# EAGLE board Zaxxon-Adaptor (EAGLE 9.6.2)
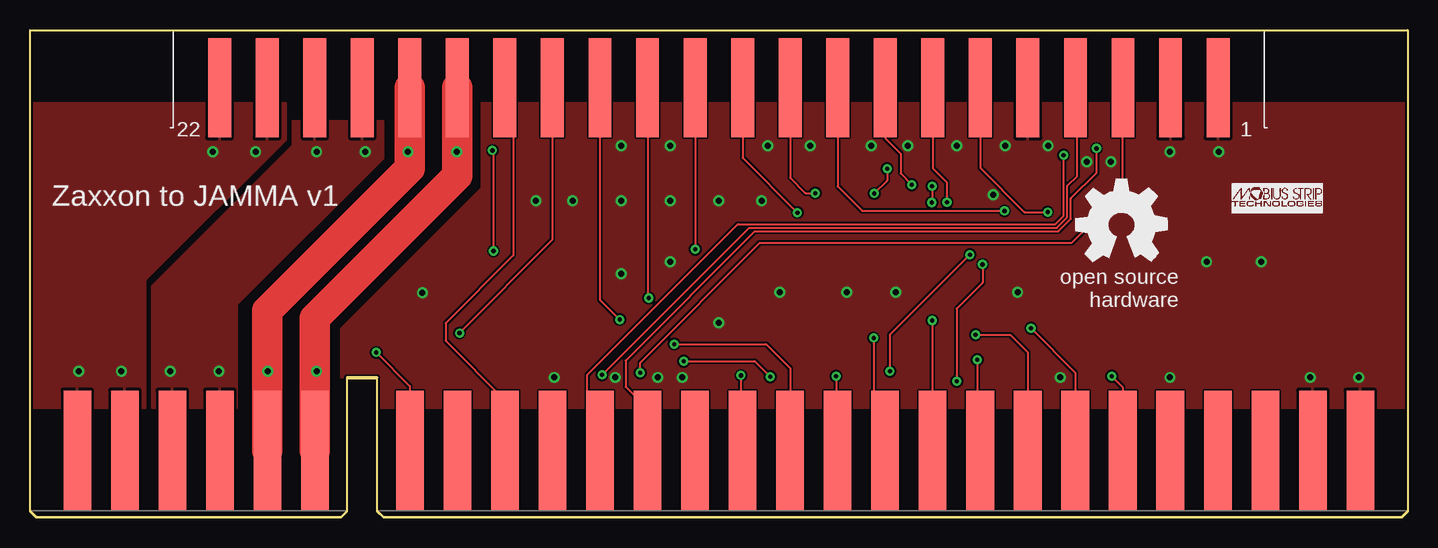
[diagram p0: board, top side]
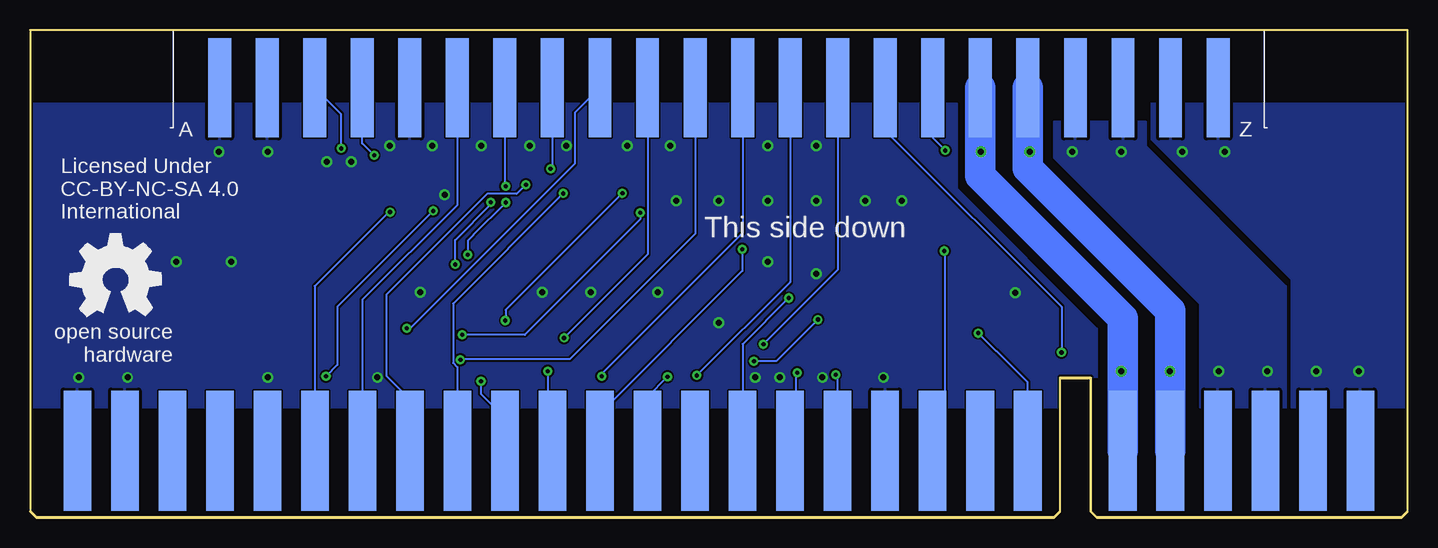
[diagram p1: board, bottom side, seen from below]

Size 114.81 x 40.64 mm. Coordinates in mm from the lower left corner, seen from the top.
Outline: 0,0.51 0,40.64 114.81,40.64 114.81,0.51 114.3,0 29.46,0 28.96,0.51 28.96,11.68 26.42,11.68 26.42,0.51 25.91,0 0.51,0 0,0.51
Copper layers (1*16): Top 0.035mm / dielectric 1.5mm / Bottom 0.035mm
Design rules "default *": minimum track width 6mil, minimum drill 0.35mm, track to track 6mil, track to pad 6mil, pad to pad 6mil, via to via 6mil, smd to smd 6mil, copper to edge 6mil, drill to drill 6mil, minimum pad ring 10mil, minimum via ring 8mil, stop-mask expansion 4mil, vias tented up to drill 23mil, thermal gap 10mil

## Footprints (pad centres in the part's own frame; a part is rotated, then mirrored left to right if it is on the bottom)
JAMMA_TOP_NOTAGS = smd 2.3 x 10: 1 -53.46,0; 2 -49.5,0; 3 -45.54,0; 4 -41.58,0; 5 -37.62,0; 6 -33.66,0; 8 -25.74,0; 9 -21.78,0; 10 -17.82,0; 11 -13.86,0; 12 -9.9,0; 13 -5.94,0; 14 -1.98,0; 15 1.98,0; 16 5.94,0; 17 9.9,0; 18 13.86,0; 19 17.82,0; 20 21.78,0; 21 25.74,0; 22 29.7,0; 23 33.66,0; 24 37.62,0; 25 41.58,0; 26 45.54,0; 27 49.5,0; 28 53.46,0
JAMMA_BOTTOM_NOTAGS = smd 2.3 x 10 bottom: _A 33.66,0; _B 37.62,0; _C 41.58,0; _D 45.54,0; _E 49.5,0; _F 53.46,0; A -53.46,0; B -49.5,0; C -45.54,0; D -41.58,0; E -37.62,0; F -33.66,0; J -25.74,0; K -21.78,0; L -17.82,0; M -13.86,0; N -9.9,0; P -5.94,0; R -1.98,0; S 1.98,0; T 5.94,0; U 9.9,0; V 13.86,0; W 17.82,0; X 21.78,0; Y 25.74,0; Z 29.7,0
44PINEDGE = smd 1.905 x 8.255: 1 -41.605,4.826; 2 -37.643,4.826; 3 -33.68,4.826; 4 -29.718,4.826; 5 -25.756,4.826; 6 -21.793,4.826; 7 -17.831,4.826; 8 -13.868,4.826; 9 -9.906,4.826; 10 -5.944,4.826; 11 -1.981,4.826; 12 1.981,4.826; 13 5.944,4.826; 14 9.906,4.826; 15 13.868,4.826; 16 17.831,4.826; 17 21.793,4.826; 18 25.756,4.826; 19 29.718,4.826; 20 33.68,4.826; 21 37.643,4.826; 22 41.605,4.826 | smd 1.905 x 8.255 bottom: A -41.605,4.826; B -37.643,4.826; C -33.68,4.826; D -29.718,4.826; E -25.756,4.826; F -21.793,4.826; H -17.831,4.826; J -13.868,4.826; K -9.906,4.826; L -5.944,4.826; M -1.981,4.826; N 1.981,4.826; P 5.944,4.826; R 9.906,4.826; S 13.868,4.826; T 17.831,4.826; U 21.793,4.826; V 25.756,4.826; W 29.718,4.826; X 33.68,4.826; Y 37.643,4.826; Z 41.605,4.826

## Placement (x,y rotation side)
E$1  [JAMMA_TOP_NOTAGS]  57.4,5.59 0 top
E$2  [JAMMA_BOTTOM_NOTAGS]  57.4,5.59 0 top
E$3  [44PINEDGE]  57.4,40.64 180 top
E$4  [TEST]  99.87,24.97 0 top
E$5  [OSHW_8MM]  90.93,24.38 0 top
E$6  [OSHW_8MM]  107.7,19.81 0 bottom

## Library data of the parts
E$1 E$2 = JAMMA
E$3 = edge-156
E$4-E$6 = oshw

## Nets
5V: E$1.3 E$1.4 E$2.C E$2.D E$3.19 E$3.20 E$3.W E$3.X
12V: E$1.6 E$2.F E$3.17 E$3.U
-5V: E$1.5 E$2.E E$3.18 E$3.V
BLUE: E$1.13 E$3.C
COINMTR1: E$1.8 E$3.S
COINMTR2: E$2.J E$3.15
COINSW1: E$1.16 E$3.R
COINSW2: E$2.T E$3.14
GND: E$1.27 E$1.28 E$2._E E$2._F E$2.M E$3.1 E$3.2 E$3.5 E$3.A E$3.B E$3.E
GND1: E$1.1 E$1.2 E$2.A E$2.B E$3.21 E$3.22 E$3.Y E$3.Z
GREEN: E$2.N E$3.4
P1BTN1: E$1.22 E$3.K
P1BTN2: E$1.23 E$3.9
P1DOWN: E$1.19 E$3.10
P1LEFT: E$1.20 E$3.M
P1RIGHT: E$1.21 E$3.11
P1START: E$1.17 E$3.N
P1UP: E$1.18 E$3.L
P2BTN1: E$2.Z E$3.F
P2BTN2: E$2._A E$3.6
P2DOWN: E$2.W E$3.7
P2LEFT: E$2.X E$3.J
P2RIGHT: E$2.Y E$3.8
P2START: E$2.U E$3.12
P2UP: E$2.V E$3.H
RED: E$1.12 E$3.D
SERVICESW: E$2.R E$3.13
SPK+: E$1.10 E$3.16
SPK-: E$2.L E$3.T
SYNC: E$2.P E$3.3
TESTSW: E$1.15 E$3.P

## Tracks (layer width: path | path; a pad name or v marks a point on that pad's centre or on a via)
5V  (via drill 0.5)
  other vias: 23.88,30.48 27.94,30.48 15.75,12.19 11.68,12.19
  pour Bottom: 10.16,9.14 17.27,9.14 17.27,17.78 29.46,29.97 29.46,33.02 21.84,33.02 21.84,30.99 21.34,30.48 10.16,19.3
  pour Top: 10.16,9.14 17.27,9.14 17.27,17.78 29.46,29.97 29.46,33.02 21.84,33.02 21.84,30.99 21.34,30.48 10.16,19.3
12V  (via drill 0.5)
  Top 0.152: v23.88,12.19 23.74,12.06 E$2.F | v35.56,30.48 35.56,33.94 35.61,33.99
  Top 2.54: E$3.U 35.61,33.99 35.61,28.5 23.74,16.63 E$2.F
  Bottom 0.152: v35.56,30.48 35.56,35.76 E$3.U
  Bottom 2.54: E$3.U 35.61,28.5 23.74,16.63 E$2.F
-5V  (via drill 0.5)
  Top 0.152: v19.81,12.19 19.78,12.16 E$1.5 | v31.5,30.48 31.5,34.38 31.65,34.53
  Top 2.54: E$3.18 31.65,34.53 31.65,29.11 19.78,17.24 E$1.5
  Bottom 0.152: v31.5,30.48 31.5,35.66 E$3.18
  Bottom 2.54: E$3.18 31.65,29.11 19.78,17.24 E$1.5
BLUE  (via drill 0.35)
  Top 0.152: E$1.13 51.46,9.06 49.63,10.9 49.63,13.08 60.4,23.85 85.7,23.85 86.74,24.89 86.74,26.6 88.88,28.74 v88.88,30.77
  Bottom 0.152: v88.88,30.77 88.88,33.61 E$3.C
COINMTR1  (via drill 0.35)
  Top 0.152: v28.85,13.77 31.66,10.96 E$1.8
  Bottom 0.152: E$3.S 43.54,32.25 28.85,17.56 v28.85,13.77
COINMTR2  (via drill 0.35)
  Top 0.152: E$3.15 43.54,23.17 35.8,15.43 v35.8,15.38
  Bottom 0.152: v35.8,15.38 34.32,13.9 34.28,13.9 31.66,11.28 E$2.J
COINSW1  (via drill 0.35)
  Top 0.152: v53.69,14.46 61.34,14.46 63.34,12.46 E$1.16
  Bottom 0.152: E$3.R 47.5,20.65 v53.69,14.46
COINSW2  (via drill 0.35)
  Top 0.152: E$3.14 47.5,18.16 v49.15,16.51 | v54.48,13.04 60.38,13.04 v61.68,11.74
  Bottom 0.152: v49.15,16.51 52.61,13.04 v54.48,13.04 | v61.68,11.74 63.34,10.08 E$2.T
GND  (via drill 0.5)
  other vias: 106.68,11.68 110.74,11.68 95,30.48 99.06,30.48 84.84,30.99 43.69,11.68 53.34,30.99 45.21,26.42 52.32,11.68 54.36,11.68 49.28,26.42 49.28,20.32 53.34,21.34 53.34,26.42 49.28,30.99 32.71,18.75 48.77,11.68 65.02,30.99 73.15,30.99 70.1,30.99 77.22,30.99 81.28,30.99 80.26,26.92 61.47,30.99 60.96,26.42 57.4,16.26 57.4,26.42 95,11.68 98.04,21.34 72.14,18.8 68.07,18.8 90.08,29.67 88.05,29.67 62.48,18.8 85.85,11.68 42.16,26.42 82.3,18.8 102.62,21.34
  pour Top: 37.59,34.54 37.59,27.43 25.91,15.75 25.91,11.68 28.96,11.68 28.96,9.14 114.81,9.14 114.81,34.54
  pour Bottom: 37.59,34.54 37.59,27.43 25.91,15.75 25.91,11.68 28.96,11.68 28.96,9.14 114.81,9.14 114.81,34.54
GND1  (via drill 0.5)
  other vias: 4.06,12.19 7.62,12.19 15.24,30.48 18.8,30.48
  pour Bottom: 0,34.54 0,9.14 9.65,9.14 9.65,19.81 21.34,31.5 21.34,34.54
  pour Top: 0,34.54 0,9.14 9.65,9.14 9.65,19.81 21.34,31.5 21.34,34.54
GREEN  (via drill 0.35)
  Top 0.152: v47.67,11.91 59.92,24.16 85.58,24.16 86.44,25.02 86.44,27.64 87.26,28.47 87.26,35.68 E$3.4
  Bottom 0.152: E$2.N 47.5,11.74 v47.67,11.91
P1BTN1  (via drill 0.35)
  Top 0.152: v83.42,15.78 87.1,12.09 E$1.22
  Bottom 0.152: E$3.K 69.39,33.73 69.39,29.5 83.11,15.78 v83.42,15.78
P1BTN2  (via drill 0.35)
  Top 0.152: E$3.9 67.31,27.6 69.35,25.56 v81.21,25.56 | v90.14,11.78 91.06,10.86 E$1.23
  Bottom 0.152: v81.21,25.56 89.19,17.58 89.19,12.73 v90.14,11.78
P1DOWN  (via drill 0.35)
  Top 0.152: E$3.10 63.35,28.32 64.62,27.05 v65.44,27.05 | v75.19,16.43 75.19,5.62 E$1.19
  Bottom 0.152: v65.44,27.05 75.18,17.31 75.18,16.45 v75.19,16.43
P1LEFT  (via drill 0.35)
  Top 0.152: v78.94,13.16 78.94,5.83 E$1.20
  Bottom 0.152: E$3.M 59.38,23.65 69.83,13.2 78.89,13.2 v78.94,13.16
P1RIGHT  (via drill 0.35)
  Top 0.152: E$3.11 59.38,29.99 v63.95,25.42 | v78.8,15.24 81.68,15.24 83.15,13.77 E$1.21
  Bottom 0.152: 68.15,20.67 63.95,24.86 v63.95,25.42 | 68.15,20.67 | 68.15,20.67 73.58,15.24 v78.8,15.24
P1START  (via drill 0.35)
  Top 0.152: v67.17,11.78 67.17,5.72 E$1.17
  Bottom 0.152: E$3.N 55.42,23.74 67.17,11.99 v67.17,11.78
P1UP  (via drill 0.35)
  Top 0.152: v70.3,14.98 70.3,6.55 E$1.18
  Bottom 0.152: E$3.L 63.35,21.93 v70.3,14.98
P2BTN1
  Bottom 0.152: E$3.F 79.2,26.05 87.1,18.14 E$2.Z
P2BTN2  (via drill 0.35)
  Top 0.152: E$3.6 79.2,29.14 82.87,25.47 v84.8,25.47
  Bottom 0.152: v84.8,25.47 84.92,25.47 91.09,19.3 91.09,5.61 E$2._A
P2DOWN  (via drill 0.35)
  Top 0.152: E$3.7 75.23,29.13 76.41,27.95 v76.41,26.28 | v79.38,21.1 79.38,19.58 77.23,17.43 v77.23,11.37
  Bottom 0.152: v77.23,11.37 77.23,10.33 75.22,8.33 E$2.W | v79.38,21.1 79.38,23.14 76.41,26.1 v76.41,26.28
P2LEFT  (via drill 0.35)
  Top 0.152: v71.43,29.07 71.43,28.08 v70.36,27.02
  Bottom 0.152: E$3.J 71.27,29.22 v71.43,29.07 | E$2.X 79.18,12.54 79.55,12.9 79.55,17.84 v70.36,27.02
P2RIGHT  (via drill 0.35)
  Top 0.152: v73.48,27.75 72.54,28.69 72.54,30.34 71.27,31.6 E$3.8
  Bottom 0.152: E$2.Y 83.14,9.89 85.1,11.85 85.1,18.59 76.71,26.98 74.25,26.98 v73.48,27.75
P2START  (via drill 0.35)
  Top 0.152: E$3.12 55.42,22.39 v55.44,22.36
  Bottom 0.152: v55.44,22.36 55.44,20.57 67.3,8.71 E$2.U
P2UP  (via drill 0.35)
  Top 0.152: v71.66,12.21 71.66,15.24 v78.33,21.91 | v75.17,27.62 75.17,26.28 v75.16,26.26
  Bottom 0.152: E$3.H 75.23,27.62 v75.17,27.62 | v71.66,12.21 71.66,5.99 E$2.V | v75.16,26.26 77.85,23.57 77.85,23.54 78.33,23.06 v78.33,21.91
RED  (via drill 0.35)
  Top 0.152: E$1.12 46.43,6.67 46.43,11.91 58.98,24.47 85.45,24.47 86.13,25.15 v86.13,30.2
  Bottom 0.152: v86.13,30.2 87.12,31.19 E$3.D
SERVICESW  (via drill 0.35)
  Top 0.152: E$3.13 51.46,18.42 v51.57,18.31
  Bottom 0.152: v51.57,18.31 55.42,14.45 E$2.R
SPK+
  Top 0.152: E$1.10 39.57,5.6 39.57,9.81 34.63,14.75 34.63,16.2 40.28,21.86 40.28,35.1 E$3.16
SPK-  (via drill 0.35)
  Top 0.152: v38.53,30.6 38.59,30.55 38.59,22.26 v38.62,22.22 38.6,22.2
  Bottom 0.152: E$3.T 39.57,31.64 v38.53,30.6 | v38.62,22.22 38.6,22.22 38.6,6.57 E$2.L
SYNC  (via drill 0.35)
  Top 0.152: v50.86,12.07 50.86,12.92 60.83,22.89 86.81,22.89 91.05,27.13 91.05,35.78 E$3.3
  Bottom 0.152: E$2.P 50.99,6.06 50.99,11.95 v50.86,12.07
TESTSW  (via drill 0.35)
  Top 0.152: v59.25,11.85 59.25,5.73 E$1.15
  Bottom 0.152: E$3.P 51.46,19.64 v59.25,11.85

## Text on the board
tPlace: Zaxxon to JAMMA v1
bPlace: This side down
bNames: Licensed Under / CC-BY-NC-SA 4.0 / International